# Altium PCB science-26.PcbDoc (part 2 of 2)
Units mm, origin at the board's own origin, x right, y up, seen from the top; angles counter-clockwise.
Board outline 76.84 x 97.03 mm, 4 copper layers (Top Layer, Layer 1, Layer 2, Bottom Layer), stack 1.586 mm thick; 101 components, 54 nets, 345 pads, 274 vias.
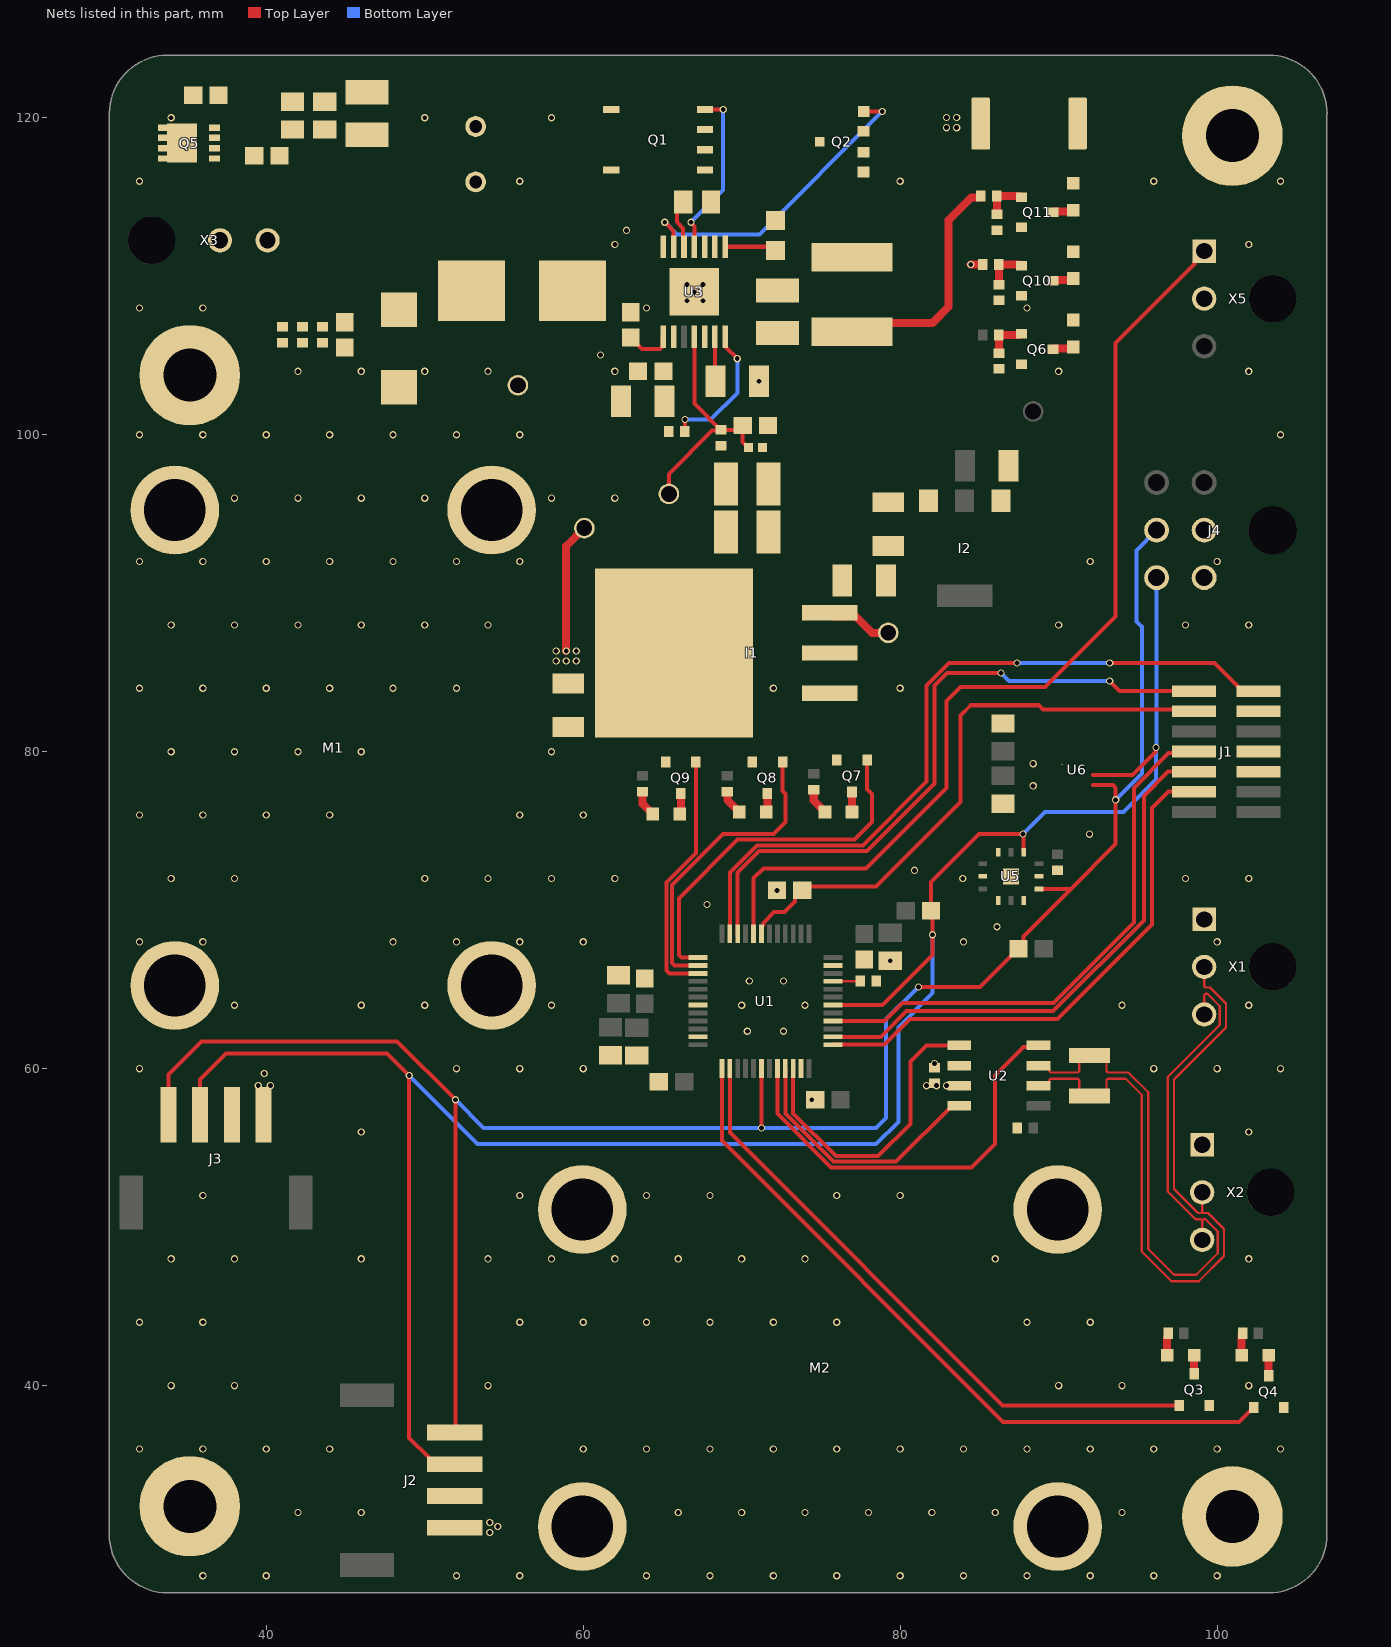
[diagram p4: the nets of this part, all layers, seen from the top]

## Via types
v1: diameter 0.46, hole 0.306, Top Layer to Bottom Layer, tented both sides, 177 vias
v2: diameter 0.46, hole 0.306, Top Layer to Bottom Layer, 97 vias

## Nets (pads, with @x,y where several pads share a name; then routed paths per layer and width w, separated by ;. In a path a pad name is that pad's centre, name@x,y a point inside that pad or via, vN(x,y) a via of type N, cw(c..) or ccw(c..) an arc to the next point about the centre after c; other vN are vias at no path point) (continued)
3V3_PGOOD: Q6.1 R22.2 R24.2 | length 2.6
  Top Layer w0.508: R24.2@86.233,105.156 86.225,105.164 86.225,106.291 R22.2@86.217,106.299 87.535,106.299 87.596,106.36 Q6.1@87.646,106.36
5V: 5V.1 C19.2 C25.1 I1.2 I1.4 J2.4 J3.4 R13.1 R21.1 U2.3 | length 9
  Top Layer w0.508: v2(58.928,86.36) 58.928,92.964 5V.1@60.071,94.107 ; v2(84.455,110.744) R21.1@85.217,110.744
  other v2: 54.102,30.734 54.61,31.115 54.102,31.369 39.497,58.928 40.259,58.928 81.661,58.928 82.296,58.928 82.931,58.928 39.878,59.69 58.293,85.725 58.928,85.725 59.563,85.725 58.293,86.36 59.563,86.36 82.931,119.38 83.566,119.38 82.931,120.015 83.566,120.015
5V_PGOOD: Q10.1 R21.2 R23.2 | length 2.7
  Top Layer w0.508: R23.2@86.233,109.474 86.225,109.482 86.225,110.736 R21.2@86.217,110.744 87.53,110.744 87.596,110.678 Q10.1@87.646,110.678
7V: 7V.1 C10.2 C13.2 C14.2 C15.2 C18.2 C20.2 I1.3 I2.3 L1.2 R5.2 R14.1 | length 19.1
  Top Layer w0.508: I1.3@75.565,88.773 75.794,88.544 77.191,88.544 78.232,87.503 7V.1@79.248,87.503 ; L1.2@76.962,106.489 77.534,107.061 82.042,107.061 83.058,108.077 83.058,113.538 84.486,114.966 85.044,114.966 85.09,115.012 R14.1@85.09,115.062
7V_PGOOD: Q11.1 R14.2 R15.1 | length 2.7
  Top Layer w0.508: R15.1@86.106,113.911 86.098,113.919 86.098,115.054 R14.2@86.09,115.062 87.53,115.062 87.596,114.996 Q11.1@87.646,114.996
BOOT: R7.2 U1.45 | length 1.7
  Top Layer w0.144: U1.45@75.751,65.512 77.458,65.512 R7.2@77.478,65.532
BST: C9.2 U3.12 | length 3.2
  Top Layer w0.254: C9.2@66.303,114.681 66.303,114.554 65.913,114.164 65.913,113.411 66.31,113.014 66.31,111.912 U3.12@66.361,111.862
CAN_N: R8.1 U2.6 X1.P$2 X2.P$2 | length 48.6
  Top Layer w0.144: U2.6@88.733,58.928 89.179,58.928 89.407,59.156 89.407,59.279 89.491,59.364 90.055,59.364 91.223,59.364 91.308,59.279 91.308,58.691 91.711,58.288 R8.1@91.948,58.288 92.621,58.288 93.024,58.691 93.024,59.279 93.108,59.364 93.595,59.364 94.234,59.364 95.25,58.348 95.25,48.459 97.117,46.592 98.844,46.592 100.438,48.185 100.438,49.885 99.427,50.896 99.142,50.896 99.058,50.981 ; X2.P$2@99.058,52.197 99.058,50.981 ; X1.P$2@99.185,66.421 99.185,65.205 99.269,65.12 99.554,65.12 100.565,64.109 100.565,62.592 97.282,59.309 97.282,52.409 98.795,50.896 98.973,50.896 99.058,50.981
CAN_P: R8.2 U2.7 X1.P$3 X2.P$3 | length 47.3
  Top Layer w0.144: U2.7@88.733,60.198 89.179,60.198 89.407,59.97 89.407,59.847 89.491,59.762 90.22,59.762 91.223,59.762 91.308,59.847 91.308,60.435 91.711,60.838 R8.2@91.948,60.838 92.621,60.838 93.024,60.435 93.024,59.847 93.108,59.762 93.43,59.762 94.399,59.762 95.648,58.513 95.648,48.624 97.282,46.99 98.679,46.99 100.039,48.35 100.039,49.72 99.262,50.498 99.142,50.498 99.058,50.413 ; X2.P$3@99.058,49.197 99.058,50.413 ; X1.P$3@99.185,63.421 99.185,64.637 99.269,64.722 99.389,64.722 100.166,63.944 100.166,62.757 96.884,59.474 96.884,52.244 98.63,50.498 98.973,50.498 99.058,50.413
CAN_RX: U1.33 U2.4 | length 16.5
  Top Layer w0.254: U1.33@72.751,60.012 72.751,57.165 75.788,54.127 79.752,54.127 83.283,57.658 U2.4@83.733,57.658
CAN_RX_LED: Q4.1 U1.25 | length 45.9
  Top Layer w0.254: U1.25@68.751,60.012 68.751,55.455 86.487,37.719 101.396,37.719 102.078,38.401 102.128,38.401 102.301,38.574 Q4.1@102.301,38.624
CAN_STB: U1.32 U2.8 | length 26.5
  Top Layer w0.254: U1.32@72.251,60.012 72.251,57.162 75.641,53.772 84.506,53.772 85.979,55.245 85.979,59.563 87.768,61.352 88.617,61.352 U2.8@88.733,61.468
CAN_TX: U1.34 U2.1 | length 19.6
  Top Layer w0.254: U1.34@73.251,60.012 73.251,57.178 75.946,54.483 78.613,54.483 80.645,56.515 80.645,60.452 81.661,61.468 U2.1@83.733,61.468
CAN_TX_LED: Q3.1 U1.26 | length 39.5
  Top Layer w0.254: U1.26@69.251,60.012 69.251,55.971 86.471,38.751 Q3.1@97.602,38.751
Debug_LED1: Q7.1 U1.13 | length 23.1
  Top Layer w0.254: U1.13@67.251,67.012 66.211,67.012 66.04,67.183 66.04,70.739 69.748,74.447 77.114,74.447 78.232,75.565 78.232,77.332 77.912,77.652 Q7.1@77.912,79.47
Debug_LED2: Q8.1 U1.14 | length 19.3
  Top Layer w0.254: U1.14@67.251,66.512 65.775,66.512 65.612,66.675 65.612,71.581 68.834,74.803 72.009,74.803 72.771,75.565 72.771,77.34 72.578,77.533 Q8.1@72.578,79.359
Debug_LED3: Q9.1 U1.15 | length 16
  Top Layer w0.254: Q9.1@67.117,79.359 67.117,73.593 65.256,71.732 65.256,66.189 65.433,66.012 U1.15@67.251,66.012
FB: 7V_FB.1 C10.1 R5.1 R6.2 U3.4 | length 15.3
  Top Layer w0.254: 7V_FB.1@65.405,96.266 65.405,97.536 68.125,100.256 68.649,100.256 R6.2@68.707,100.314 69.796,100.314 R5.1@70.066,100.584 70.066,99.543 C10.1@70.421,99.187 ; U3.4@67.011,106.172 67.011,101.96 R6.2@68.657,100.314
GND: C1.1 C2.1 C3.1 C4.1 C5.1 C6.1 C7.1 C8.1 C11.2 C12.2 C13.1 C14.1 C15.1 C16.2 C17.2 C18.1 C19.1 C20.1 C21.1 C22.2 C23.2 C24.2 C25.2 C26.2 C27.2 C28.1 C29.1 C30.1 C31.1 C32.1 C33.1 C34.1 C35.2 D3.1 I1.1 I2.1 J1.05 J1.07 J1.11 J2.3 J3.3 J4.2 J4.3 M1.0 M2.0 pad. Q2.2 Q3.2 Q4.2 Q5.3 Q6.2 Q7.2 Q8.2 Q9.2 Q10.2 Q11.2 R6.1 R7.1 R12.2 R15.2 R23.1 R24.1 U1.19 U1.23 U1.35 U1.47 U2.2 U3.5 U3.9 U3.14 U3.15 U5.1 U5.3 U5.5 U5.9 U5.11 U5.13 U6.1 U6.5 U6.7 X1.P$1 X2.P$1 X5.P$2
  other v1: 36,28 40,28 52,28 56,28 64,28 68,28 72,28 76,28 80,28 84,28 88,28 92,28 96,28 100,28 42,32 46,32 66,32 70,32 74,32 78,32 82,32 86,32 94,32 32,36 36,36 40,36 44,36 60,36 64,36 68,36 72,36 76,36 80,36 84,36 88,36 92,36 96,36 100,36 104,36 34,40 38,40 54,40 90,40 94,40 102,40 32,44 36,44 56,44 60,44 64,44 68,44 72,44 76,44 88,44 92,44 34,48 38,48 46,48 54,48 58,48 62,48 66,48 70,48 74,48 86,48 102,48 36,52 56,52 64,52 68,52 76,52 80,52 46,56 102,56 32,60 52,60 56,60 60,60 96,60 100,60 104,60 38,64 46,64 50,64 58,64 70,64 74,64 94,64 102,64 32,68 36,68 48,68 52,68 56,68 60,68 84,68 100,68 34,72 38,72 50,72 54,72 58,72 62,72 98,72 102,72 32,76 36,76 40,76 44,76 56,76 60,76 34,80 38,80 42,80 46,80 58,80 32,84 36,84 40,84 44,84 48,84 52,84 72,84 80,84 34,88 38,88 42,88 46,88 50,88 54,88 90,88 98,88 102,88 32,92 36,92 40,92 44,92 48,92 52,92 56,92 92,92 100,92 38,96 42,96 46,96 50,96 58,96 62,96 32,100 36,100 40,100 44,100 48,100 52,100 56,100 104,100 42,104 46,104 50,104 54,104 62,104 90,104 102,104 32,108 36,108 64,108 88,108 62,112 102,112 32,116 56,116 80,116 96,116 104,116 34,120 50,120 58,120
  other v2: 74.422,58.034 82.169,60.32 70.358,62.357 72.644,62.357 70.485,65.532 72.644,65.532 79.375,66.806 86.106,68.956 67.818,70.353 72.225,71.242 83.947,72.004 80.899,72.512 91.948,74.798 88.392,77.846 88.392,79.248 71.098,103.373 61.087,105.029 66.548,108.453 67.564,108.453 67.011,109.012 66.548,109.474 67.564,109.474 62.738,112.898
HG: Q1.1 U3.11 | length 10.7
  Top Layer w0.254: v2(66.802,113.411) 66.802,113.355 67.011,113.146 U3.11@67.011,111.862 ; Q1.1@67.691,120.523 v2(68.834,120.523)
  Bottom Layer w0.254: v2(66.802,113.411) 68.834,115.443 v2(68.834,120.523)
ILIM: R4.1 U3.8 | length 3.3
  Top Layer w0.254: U3.8@68.961,111.862 71.907,111.862 R4.1@72.136,111.633
LG: Q2.1 U3.13 | length 20.2
  Top Layer w0.254: v2(65.151,113.411) 65.711,112.851 U3.13@65.711,111.862 ; Q2.1@77.705,120.391 77.708,120.393 78.864,120.393 v2(78.867,120.396)
  Bottom Layer w0.254: v2(65.151,113.411) 65.913,112.649 71.12,112.649 v2(78.867,120.396)
Net3V3_PG_2: 3V3_PG.2 Q6.3 | length 1.3
  Top Layer w0.508: Q6.3@89.646,105.41 89.692,105.456 90.851,105.456 3V3_PG.2@90.932,105.537
Net5V_PG_2: 5V_PG.2 Q10.3 | length 1.3
  Top Layer w0.508: Q10.3@89.646,109.728 89.692,109.774 90.851,109.774 5V_PG.2@90.932,109.855
Net7V_PG_2: 7V_PG.2 Q11.3 | length 1.3
  Top Layer w0.508: Q11.3@89.646,114.046 89.692,114.092 90.851,114.092 7V_PG.2@90.932,114.173
NetCAN_RX_1: CAN_RX.1 R10.1 | length 1.4
  Top Layer w0.508: CAN_RX.1@101.549,41.91 101.549,43.198 R10.1@101.608,43.257
NetCAN_RX_2: CAN_RX.2 Q4.3 | length 1.3
  Top Layer w0.508: Q4.3@103.251,40.624 CAN_RX.2@103.251,41.91
NetCAN_TX_1: CAN_TX.1 R9.1 | length 1.3
  Top Layer w0.508: CAN_TX.1@96.85,41.91 96.85,43.071 96.909,43.13 R9.1@96.909,43.18
NetCAN_TX_2: CAN_TX.2 Q3.3 | length 1.2
  Top Layer w0.508: Q3.3@98.552,40.751 CAN_TX.2@98.552,41.91
NetDBG1_1: DBG1.1 R16.1 | length 1.7
  Top Layer w0.508: R16.1@74.549,77.605 74.549,76.911 DBG1.1@75.26,76.2
NetDBG1_2: DBG1.2 Q7.3 | length 1.3
  Top Layer w0.508: DBG1.2@76.962,76.2 Q7.3@76.962,77.47
NetDBG2_1: DBG2.1 R17.1 | length 1.6
  Top Layer w0.508: R17.1@69.088,77.478 69.111,77.455 69.111,76.939 DBG2.1@69.85,76.2
NetDBG2_2: DBG2.2 Q8.3 | length 1.1
  Top Layer w0.508: DBG2.2@71.552,76.2 71.628,76.276 Q8.3@71.628,77.309
NetDBG3_1: DBG3.1 R18.1 | length 1.7
  Top Layer w0.508: R18.1@63.754,77.478 63.754,76.708 DBG3.1@64.389,76.073
NetDBG3_2: DBG3.2 Q9.3 | length 1.3
  Top Layer w0.508: DBG3.2@66.091,76.073 66.167,76.149 Q9.3@66.167,77.309
NetQ5_1: Q5.1 R11.2 R12.1
NRST: C35.1 J1.12 U1.7 | length 37
  Top Layer w0.254: U1.7@71.251,68.512 71.251,68.956 71.37,69.075 71.37,69.204 72.049,69.883 72.698,69.883 73.377,70.562 73.377,70.824 C35.1@73.8,71.247 ; C35.1@73.825,71.247 74.079,71.501 78.486,71.501 83.82,76.835 83.82,82.296 84.455,82.931 88.773,82.931 89.027,82.677 J1.12@98.549,82.677
PGOOD+: 3V3_PG.1 5V_PG.1 7V_PG.1 R13.2
RevPolDrain: Q5.2 X3.P$1
RON: R3.2 U3.7 | length 8.6
  Top Layer w0.254: R3.2@66.413,100.203 66.417,100.207 66.417,100.961 v2(66.421,100.965) ; U3.7@68.961,106.172 69.012,106.121 69.012,105.519 v2@69.723,104.808
  Bottom Layer w0.254: v2(66.421,100.965) 68.044,100.965 69.723,102.644 v2(69.723,104.803)
SCL: J2.1 J3.1 J4.5 R2.2 U1.30 U5.4 U6.4 | length 127
  Top Layer w0.254: J3.1@33.83,57.106 33.83,59.642 35.91,61.722 48.26,61.722 v2(51.943,58.039) 51.943,37.08 J2.1@51.899,37.036 ; v2(71.247,56.261) 71.249,56.263 71.249,60.01 U1.30@71.251,60.012 ; v2(81.153,65.151) 85.027,65.151 87.44,67.564 R2.2@87.465,67.564 87.777,67.876 87.777,68.346 90.767,71.336 ; U5.4@88.767,71.336 90.767,71.336 ; U6.4@92.156,77.892 93.431,77.892 93.599,77.724 93.599,74.168 90.767,71.336
  Bottom Layer w0.254: v2(51.943,58.039) 53.721,56.261 v2(71.247,56.261) 78.486,56.261 79.121,56.896 79.121,63.119 v2(81.153,65.151) ; v2(93.599,76.962) 95.25,78.613 95.25,87.884 94.915,88.219 94.915,92.71 J4.5@96.185,93.98
SDA: J2.2 J3.2 J4.6 R1.2 U1.42 U5.7 U6.3 | length 136.8
  Top Layer w0.254: J3.2@35.83,57.106 35.83,59.325 37.465,60.96 47.625,60.96 v2(49.022,59.563) 49.022,36.703 50.276,35.449 50.276,35.409 50.334,35.351 51.584,35.351 J2.2@51.899,35.036 ; U1.42@75.751,64.012 78.871,64.012 82.038,67.179 v2(82.038,68.449) 82.038,69.892 R1.2@81.953,69.977 81.953,71.793 84.963,74.803 v2(87.757,74.803) 87.775,74.785 87.775,73.679 U5.7@87.792,73.661 ; U6.3@92.156,78.542 94.671,78.542 96.1,79.971 96.1,80.225 v2(96.139,80.264)
  Bottom Layer w0.254: v2(49.022,59.563) 53.34,55.245 78.486,55.245 79.883,56.642 79.883,62.611 82.038,64.766 v2(82.038,68.449) ; v2(87.757,74.803) 89.154,76.2 94.107,76.2 96.139,78.232 v2(96.139,80.264) 96.162,80.287 96.162,90.869 J4.6@96.139,90.892
SS: C16.1 U3.6 | length 2.8
  Top Layer w0.254: U3.6@68.311,106.172 68.311,103.415 C16.1@68.348,103.378
STLINK_RX: J1.13 U1.11 | length 47
  Top Layer w0.254: U1.11@69.251,68.512 69.251,72.382 70.961,74.092 77.648,74.092 81.661,78.105 81.661,84.169 83.09,85.598 v2(87.376,85.598) ; v2(93.218,85.598) 99.822,85.598 101.351,84.069 101.351,84.063 101.467,83.947 J1.13@102.619,83.947
  Bottom Layer w0.254: v2(87.376,85.598) v2(93.218,85.598)
STLINK_TX: J1.14 U1.10 | length 42
  Top Layer w0.254: U1.10@69.751,68.512 69.751,72.379 71.098,73.726 77.917,73.726 82.169,77.978 82.169,84.174 82.958,84.963 v2(86.36,84.963) ; v2(93.218,84.455) 93.853,83.82 J1.14@98.549,83.82
  Bottom Layer w0.254: v2(86.36,84.963) 86.868,84.455 v2(93.218,84.455)
SW: C9.1 L1.1 Q1.2 Q2.3 R4.2 U3.10
SWCLK: J1.06 U1.38 | length 34.3
  Top Layer w0.254: U1.38@75.751,62.012 78.776,62.012 80.391,63.627 89.657,63.627 95.377,69.347 95.377,77.216 96.901,78.74 J1.06@98.549,78.74
SWDIO: J1.04 U1.37 | length 33.8
  Top Layer w0.254: U1.37@75.751,61.512 79.012,61.512 80.619,63.119 89.916,63.119 95.885,69.088 95.885,76.454 96.922,77.491 98.443,77.491 J1.04@98.549,77.597
SWO: J1.08 U1.40 | length 34.8
  Top Layer w0.254: U1.40@75.751,63.012 79.014,63.012 80.137,64.135 89.662,64.135 94.742,69.215 94.742,77.724 96.922,79.904 98.443,79.904 J1.08@98.549,80.01
UV_OUT: U1.8 X5.P$1 | length 61.8
  Top Layer w0.254: U1.8@70.751,68.512 70.751,72.021 71.374,72.644 77.851,72.644 82.931,77.724 82.931,83.185 83.82,84.074 89.154,84.074 93.599,88.519 93.599,105.791 98.571,110.763 98.571,110.971 X5.P$1@99.185,111.585
VBAT: C11.1 C12.1 F1.2 Q1.3 R3.1 U3.2 VBAT.1
VBAT_UNFUSED: C27.1 C28.2 C29.2 C30.2 C31.2 C32.2 C33.2 C34.2 D3.2 F1.1 R11.1 X3.P$2
VCC: C17.1 U3.1 | length 3
  Top Layer w0.254: C17.1@62.992,106.134 62.992,106.109 63.415,105.686 63.44,105.686 63.716,105.41 64.861,105.41 65.01,105.559 65.01,106.121 U3.1@65.061,106.172
pads on no net: J1.01 J1.02 J1.09 J1.10 J2.SH1 J2.SH2 J3.SH1 J3.SH2 J4.7 U1.2 U1.3 U1.4 U1.5 U1.6 U1.9 U1.12 U1.16 U1.17 U1.18 U1.22 U1.27 U1.28 U1.29 U1.31 U1.39 U1.41 U1.43 U1.44 U1.46 U3.3 U5.2 U5.8 U5.10 U5.12 X1.1 X2.1 X3.1 X5.1

## Polygon pours and split planes (outlines as drawn)
GND on Top Layer "GND_TOP" (solid, pour order 30): 30.033,30.543 ccw(c33.719,30.543) 33.719,26.858 103.183,26.858 103.185,26.856 ccw(c103.185,30.541) 106.871,30.541 106.871,120.199 106.873,120.201 ccw(c103.188,120.201) 103.188,123.886 33.723,123.886 33.721,123.888 ccw(c33.721,120.203) 30.036,120.203
7V on Top Layer "NONET_L-01_P-001" (solid, pour order 6): 70.739,92.583 71.12,92.202 73.533,92.202 73.66,92.075 73.66,88.265 73.787,88.138 77.343,88.138 77.47,88.265 77.47,94.107 77.851,94.488 82.042,94.488 82.55,94.996 82.55,107.344 82.325,107.569 70.866,107.569 70.485,107.188 70.485,105.918 71.247,105.156 71.882,105.156 72.263,104.775 72.263,101.981 72.009,101.727 71.247,101.727 70.959,101.439 70.959,98.645 70.739,98.425
PGOOD+ on Top Layer "NONET_L-01_P-001" (solid, pour order 29): 90.401,121.262 90.678,121.539 93.091,121.539 93.345,121.285 93.345,107.442 92.583,106.68 90.551,106.68 90.424,106.807 90.424,107.696 90.551,107.823 91.694,107.823 92.075,108.204 92.075,110.744 91.948,110.871 90.551,110.871 90.424,110.998 90.424,112.014 90.551,112.141 91.694,112.141 92.075,112.522 92.075,115.062 91.821,115.316 90.424,115.316 90.401,115.339
3V3 on Top Layer "NONET_L-01_P-001" (solid, pour order 7): 84.73,100.965 85.217,100.965 85.228,100.954 85.228,100.468 84.963,100.203 84.963,91.821 86.233,90.551 86.233,86.487 85.852,86.106 82.677,86.106 82.042,86.741 82.042,90.551 83.312,91.821 83.312,100.838 83.947,101.473 84.222,101.473
NetQ5_1 on Top Layer "NONET_L-01_P-001" (solid, pour order 2): 36.322,122.047 36.449,122.174 38.354,122.174 39.878,120.65 39.878,116.967 39.751,116.84 38.735,116.84 38.481,117.094 38.481,118.364 37.694,119.151 36.424,119.151 36.322,119.253
VBAT_UNFUSED on Top Layer "NONET_L-01_P-001" (solid, pour order 1): 38.862,108.077 40.513,106.426 54.61,106.426 55.372,107.188 55.372,115.189 53.086,117.475 50.673,117.475 48.26,119.888 40.386,119.888 40.259,119.761 40.259,115.316 38.862,113.919
3V3 on Top Layer "NONET_L-01_P-001" (solid, pour order 28): 91.939,79.437 91.883,79.437 91.821,79.375 91.821,78.994 91.948,78.867 94.361,78.867 94.615,79.121 94.615,79.502 94.488,79.629 94.107,79.629 93.912,79.434
3V3 on Top Layer "NONET_L-01_P-001" (solid, pour order 8): 60.96,61.849 60.833,61.976 60.833,64.643 60.96,64.77 65.405,64.77 65.532,64.643 65.532,64.008 65.858,63.682 67.89,63.682 67.945,63.627 67.945,62.898 67.847,62.8 66.482,62.799 66.294,62.611 66.294,61.849 66.421,61.722 67.818,61.722 67.945,61.595 67.945,58.674 67.691,58.42 65.786,58.42 65.659,58.547 65.659,61.341 65.151,61.849
3V3 on Top Layer "NONET_L-01_P-001" (solid, pour order 9): 80.899,70.739 80.772,70.866 77.978,70.866 76.581,69.469 74.168,69.469 74.041,69.342 74.04,67.942 75.18,66.802 76.454,66.802 76.708,67.056 76.708,67.437 77.089,67.818 80.772,67.818 80.899,67.945
3V3 on Top Layer "NONET_L-01_P-001" (solid, pour order 10): 75.692,57.404 75.565,57.531 75.565,58.801 75.184,59.182 74.295,59.182 74.078,59.399 74.07,59.399 74.07,60.735 74.168,60.833 75.565,60.833 77.724,58.674 77.724,57.531 77.597,57.404
5V on Top Layer "NONET_L-01_P-001" (solid, pour order 22): 83.058,121.412 85.852,121.412 86.106,121.158 86.106,118.237 85.788,117.919 82.995,117.919 82.486,118.427 82.486,120.84
3V3 on Top Layer "NONET_L-01_P-001" (solid, pour order 21): 101.092,77.978 101.219,78.105 105.156,78.105 105.41,77.851 105.41,77.343 105.156,77.089 101.219,77.089 101.092,77.216
3V3 on Top Layer "NONET_L-01_P-001" (solid, pour order 20): 88.005,58.039 87.884,57.918 87.884,55.88 88.011,55.753 90.424,55.753 90.551,55.88 90.551,57.15 89.662,58.039
3V3 on Top Layer "NONET_L-01_P-001" (solid, pour order 18): 84.455,77.724 84.328,77.851 84.328,80.645 84.455,80.772 89.789,80.772 90.551,80.01 90.551,79.756 90.424,79.629 88.138,79.629 88.011,79.502 88.011,78.867 88.056,78.822 88.678,78.822 88.684,78.829 90.456,78.829 90.551,78.734 90.551,78.359 90.487,78.295 88.074,78.295 87.503,77.724
5V on Top Layer "NONET_L-01_P-001" (solid, pour order 17): 81.407,58.547 81.28,58.674 81.28,59.309 81.407,59.436 84.455,59.436 84.582,59.309 84.582,58.674 84.455,58.547
5V on Top Layer "NONET_L-01_P-001" (solid, pour order 15): 54.864,31.877 50.292,31.877 50.038,31.623 50.038,30.734 50.419,30.353 54.737,30.353 55.118,30.734 55.118,31.623
5V on Top Layer "NONET_L-01_P-001" (solid, pour order 14): 39.116,59.944 39.116,55.372 39.37,55.118 40.259,55.118 40.64,55.499 40.64,59.817 40.259,60.198 39.37,60.198
5V on Top Layer "NONET_L-01_P-001" (solid, pour order 12): 65.659,86.995 77.343,86.995 77.597,86.741 77.597,85.598 77.343,85.344 65.786,85.344 63.754,83.312 60.833,83.312 60.579,83.566 58.039,83.566 57.912,83.693 57.912,86.614 60.96,89.662 62.992,89.662
SW on Top Layer "NONET_L-01_P-001" (solid, pour order 5): 79.502,109.982 79.756,110.236 79.756,112.522 76.962,115.316 76.962,120.65 76.708,120.904 71.501,120.904 70.231,119.634 67.31,119.634 67.056,119.38 67.056,115.57 67.437,115.189 67.437,111.252 67.564,111.125 67.691,111.125 67.818,111.252 67.818,113.157 68.072,113.411 70.866,113.411 71.501,112.776 73.533,112.776 74.295,112.014 74.295,110.363 74.676,109.982
VBAT on Top Layer "NONET_L-01_P-001" (solid, pour order 4): 57.15,100.324 55.626,101.848 55.626,104.521 57.15,106.045 57.15,117.602 60.706,121.158 65.786,121.158 66.294,120.65 66.294,116.459 65.659,115.824 63.373,115.824 60.833,113.284 60.833,107.061 59.563,105.791 59.563,102.743 61.595,100.711 64.262,100.711 64.389,100.838 64.389,104.775 64.516,104.902 65.024,104.902 65.405,105.283 65.405,106.807 65.532,106.934 65.786,106.934 65.913,106.807 65.913,105.156 65.786,105.029 65.786,99.695 64.389,98.298 59.389,98.298
RevPolDrain on Top Layer "NONET_L-01_P-001" (solid, pour order 3): 36.195,111.252 36.449,110.998 37.592,110.998 37.973,111.379 37.973,118.364 37.338,118.999 36.449,118.999 36.195,118.745
GND on Bottom Layer "GND_BTM" (solid, pour order 26): 30.033,30.543 ccw(c33.719,30.543) 33.719,26.858 103.183,26.858 103.185,26.856 ccw(c103.185,30.541) 106.871,30.541 106.871,120.199 106.873,120.201 ccw(c103.188,120.201) 103.188,123.886 33.723,123.886 33.721,123.888 ccw(c33.721,120.203) 30.036,120.203
5V on Bottom Layer "NONET_L-01_P-001" (solid, pour order 13): 85.217,109.474 43.434,67.691 43.434,44.577 51.181,36.83 53.467,36.83 55.88,39.243 56.742,40.132 77.978,40.132 81.153,43.307 81.153,59.182 81.407,59.436 83.058,59.436 83.312,59.182 83.312,41.783 78.613,37.084 58.166,37.084 55.499,34.417 55.499,31.242 54.356,30.099 52.578,30.099 39.116,43.561 39.116,68.961 57.785,87.63 59.944,87.63 82.423,110.109 82.423,120.777 83.058,121.412 84.836,121.412 85.217,121.031
3V3 on Bottom Layer "NONET_L-01_P-001" (solid, pour order 19): 104.267,77.978 105.283,77.978 105.918,77.343 105.918,76.2 103.759,74.041 97.282,74.041 91.567,68.453 91.567,58.928 96.52,53.975 96.52,46.482 99.187,43.815 103.632,43.815 103.886,43.561 103.886,43.053 103.632,42.799 96.393,42.799 94.615,44.577 94.615,52.324 91.313,55.626 89.282,55.671 88.519,56.388 88.392,56.515 88.392,68.961 88.138,68.961 83.947,73.152 79.883,73.152 79.248,72.517 79.248,69.342 77.724,67.818 77.724,57.531 77.597,57.404 75.692,57.404 75.374,57.721 75.374,71.945 73.787,73.533 67.31,73.533 65.659,71.882 65.659,62.865 64.897,62.103 64.262,62.103 63.754,62.611 63.754,73.724 63.373,74.105 63.373,79.502 63.754,79.883 64.262,79.883 64.516,79.629 64.516,76.263 65.405,75.374 68.008,75.374 68.326,75.692 68.326,79.629 68.58,79.883 69.469,79.883 69.723,79.629 69.723,75.692 70.04,75.374 73.596,75.374 73.914,75.692 73.914,79.883 74.168,80.137 74.803,80.137 75.057,79.883 75.057,75.692 75.374,75.374 81.343,75.374 82.042,76.073 82.042,88.265 83.312,89.535 83.312,91.44 98.552,106.68 99.695,106.68 100.584,105.791 100.584,96.52 99.949,95.885 93.218,95.885 85.725,88.392 85.725,81.84 86.031,81.534 92.71,81.534 94.615,79.629 94.615,79.248 94.361,78.994 93.98,78.994 92.075,80.899 85.979,80.899 85.725,80.645 85.725,75.289 87.1,73.914 93.471,73.914 96.011,76.454 102.743,76.454
GND on Layer 1 "t" (solid, pour order 25): 30.033,30.543 ccw(c33.719,30.543) 33.719,26.858 103.183,26.858 103.185,26.856 ccw(c103.185,30.541) 106.871,30.541 106.871,120.199 106.873,120.201 ccw(c103.188,120.201) 103.188,123.886 33.723,123.886 33.721,123.888 ccw(c33.721,120.203) 30.036,120.203
GND on Layer 2 "GND_L2" (solid, pour order 27): 30.033,30.543 ccw(c33.719,30.543) 33.719,26.858 103.183,26.858 103.185,26.856 ccw(c103.185,30.541) 106.871,30.541 106.871,120.199 106.873,120.201 ccw(c103.188,120.201) 103.188,123.886 33.723,123.886 33.721,123.888 ccw(c33.721,120.203) 30.036,120.203

## Silkscreen, mask and mechanical layers (free items; w line width, h text height)
Top Overlay:
  lines w0.254: 30.375,49.412 43.307,49.412 ; 41.012,108.585 41.012,115.951 ; 44.205,27.559 44.205,40.491 ; 94.996,87.122 95.005,100.943 ; 97.926,45.72 97.926,58.652 ; 98.053,59.944 98.053,72.876 ; 98.053,102.235 98.053,115.167 ; 30.099,120.269 cw(c33.784,120.269) 33.784,123.954 ccw(c33.784,120.269) 30.099,120.269 ; 30.099,120.269 30.099,30.611 30.099,120.269 ; 33.782,26.924 cw(c33.782,30.609) 30.097,30.609 ccw(c33.782,30.609) 33.782,26.924 ; 33.782,26.924 103.247,26.924 33.782,26.924 ; 103.251,123.952 cw(c103.251,120.267) 106.936,120.267 ccw(c103.251,120.267) 103.251,123.952 ; 103.251,123.952 33.786,123.952 103.251,123.952 ; 106.934,30.607 cw(c103.249,30.607) 103.249,26.922 ccw(c103.249,30.607) 106.934,30.607 ; 106.934,30.607 106.934,120.265 106.934,30.607 ; 28.067,108.585 28.067,115.951 44.831,115.951 44.831,108.585 28.067,108.585 ; 30.226,61.722 57.404,61.722 57.404,98.933 30.226,98.933 30.226,61.722 ; 30.353,47.253 43.307,47.253 43.307,59.309 30.353,59.309 30.353,47.253 ; 42.046,27.559 42.046,40.513 54.102,40.513 54.102,27.559 42.046,27.559 ; 56.388,27.625 56.388,54.803 93.599,54.803 93.599,27.625 56.388,27.625 ; 90.424,86.995 90.424,100.965 108.585,100.965 108.585,86.995 90.424,86.995 ; 95.894,45.72 95.894,58.674 108.077,58.674 108.077,45.72 95.894,45.72 ; 96.021,59.944 96.021,72.898 108.204,72.898 108.204,59.944 96.021,59.944 ; 96.021,102.235 96.021,115.189 108.204,115.189 108.204,102.235 96.021,102.235
  text "VBAT+" at 43.307,114.046 h0.64 r270
  text "VBAT" at 45.466,113.919 h0.64 r270
  text "GND" at 41.783,113.665 h0.64 r270
  text "UV" at 97.536,111.125 h0.64 r90
  text "UV" at 95.377,107.315 h0.64 r90
  text "GND" at 97.536,107.188 h0.64 r90
  text "3V3" at 97.536,103.124 h0.64 r90
  text "3V3" at 94.488,96.901 h0.64 r90
  text "3V3" at 92.329,96.774 h0.64 r90
  text "OXYGEN" at 42.672,94.615 h0.64
  text "GND" at 94.488,92.964 h0.64 r90
  text "SCL" at 92.329,92.837 h0.64 r90
  text "THP & CO2" at 89.535,90.17 h0.64 r90
  text "GND" at 94.488,88.9 h0.64 r90
  text "SDA" at 92.329,88.773 h0.64 r90
  text "FLASHING" at 95.631,77.978 h0.64 r90
  text "GND" at 97.536,68.834 h0.64 r90
  text "CAN1" at 95.377,64.897 h0.64 r90
  text "CANL" at 97.536,64.897 h0.64 r90
  text "CANH" at 97.536,60.833 h0.64 r90
  text "GND" at 97.409,54.61 h0.64 r90
  text "CAN0" at 95.377,50.673 h0.64 r90
  text "CANL" at 97.409,50.673 h0.64 r90
  text "SCL" at 30.988,47.879 h0.64
  text "SDA" at 33.909,47.879 h0.64
  text "GND" at 37.084,47.879 h0.64
  text "5V" at 40.259,47.879 h0.64
  text "CANH" at 97.409,46.609 h0.64 r90
  text "OXYGEN" at 34.417,45.466 h0.64
  text "OZONE" at 90.17,39.624 h0.64 r90
  text "SCL" at 43.688,37.465 h0.64 r90
  text "SDA" at 43.688,34.671 h0.64 r90
  text "OZONE" at 41.402,32.512 h0.64 r90
  text "GND" at 43.688,31.496 h0.64 r90
  text "5V" at 43.688,29.21 h0.64 r90
Bottom Overlay:
  drawing of 3743 lines, arcs and shapes, not listed
  text "AS ML AK VM JG JC AM PG DH TC FA SV PN JM" at 61.468,77.343 h0.64

## Text inside footprints (layer, text, board x,y; h text height)
C27: Top Overlay "+" at 52.713,112.701 h1.02 r270; Mechanical 13 "+" at 52.713,112.701 h1.02 r270